# Altium PCB VCO_PCB.PcbDoc
Units mm, origin at the board's own origin, x right, y up, seen from the top; angles counter-clockwise.
Board outline 76.92 x 37.06 mm, 2 copper layers (Top Layer, Bottom Layer); 50 components, 27 nets, 118 pads, 28 vias.
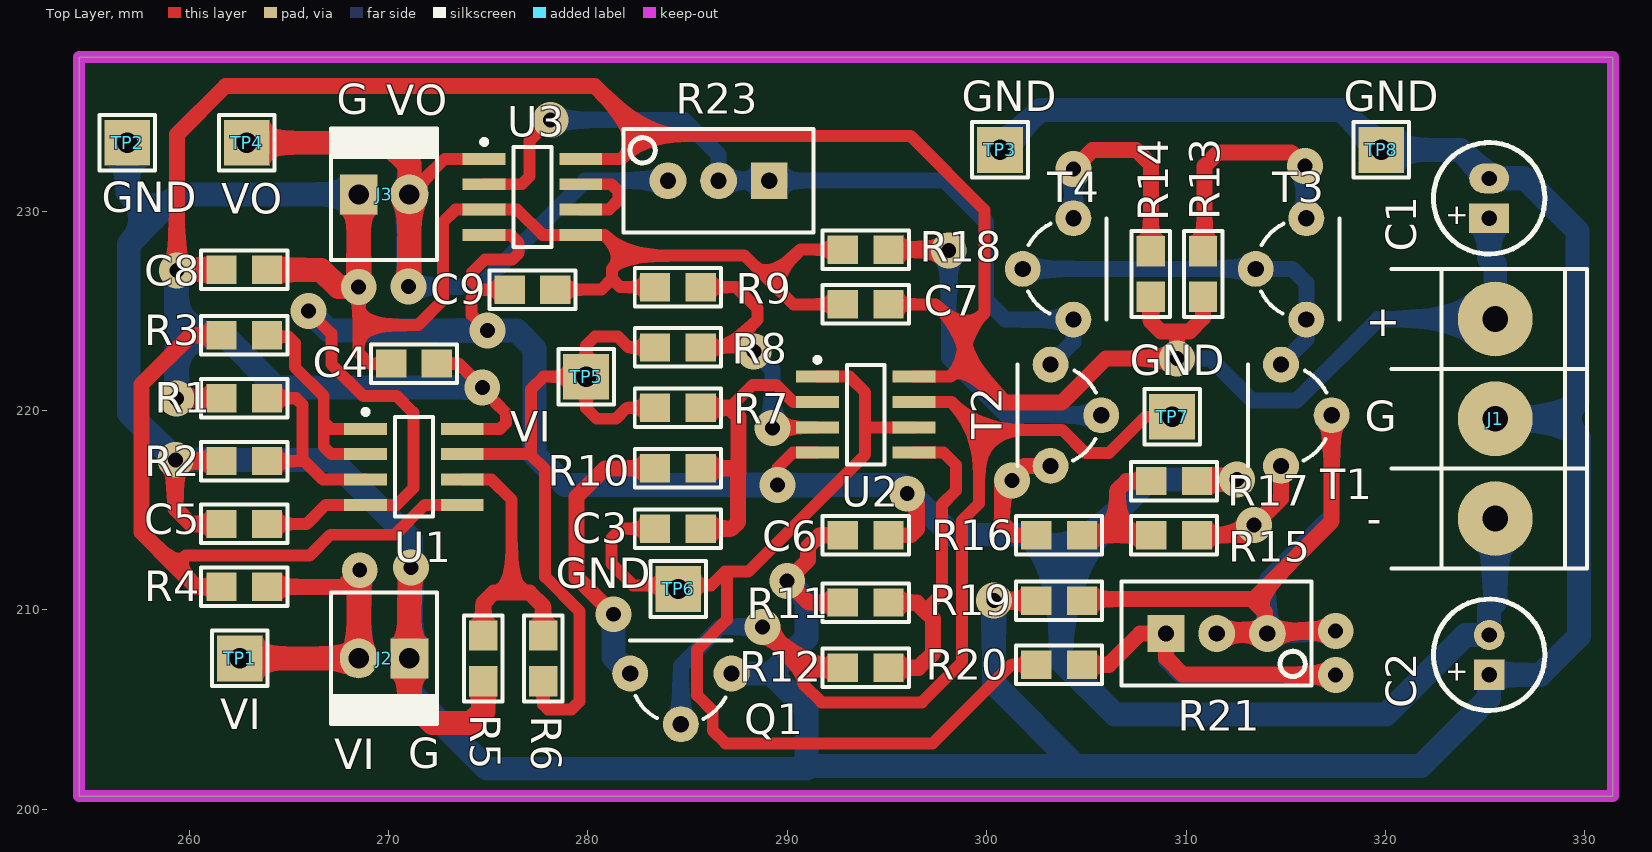
[diagram p0: Top Layer view]
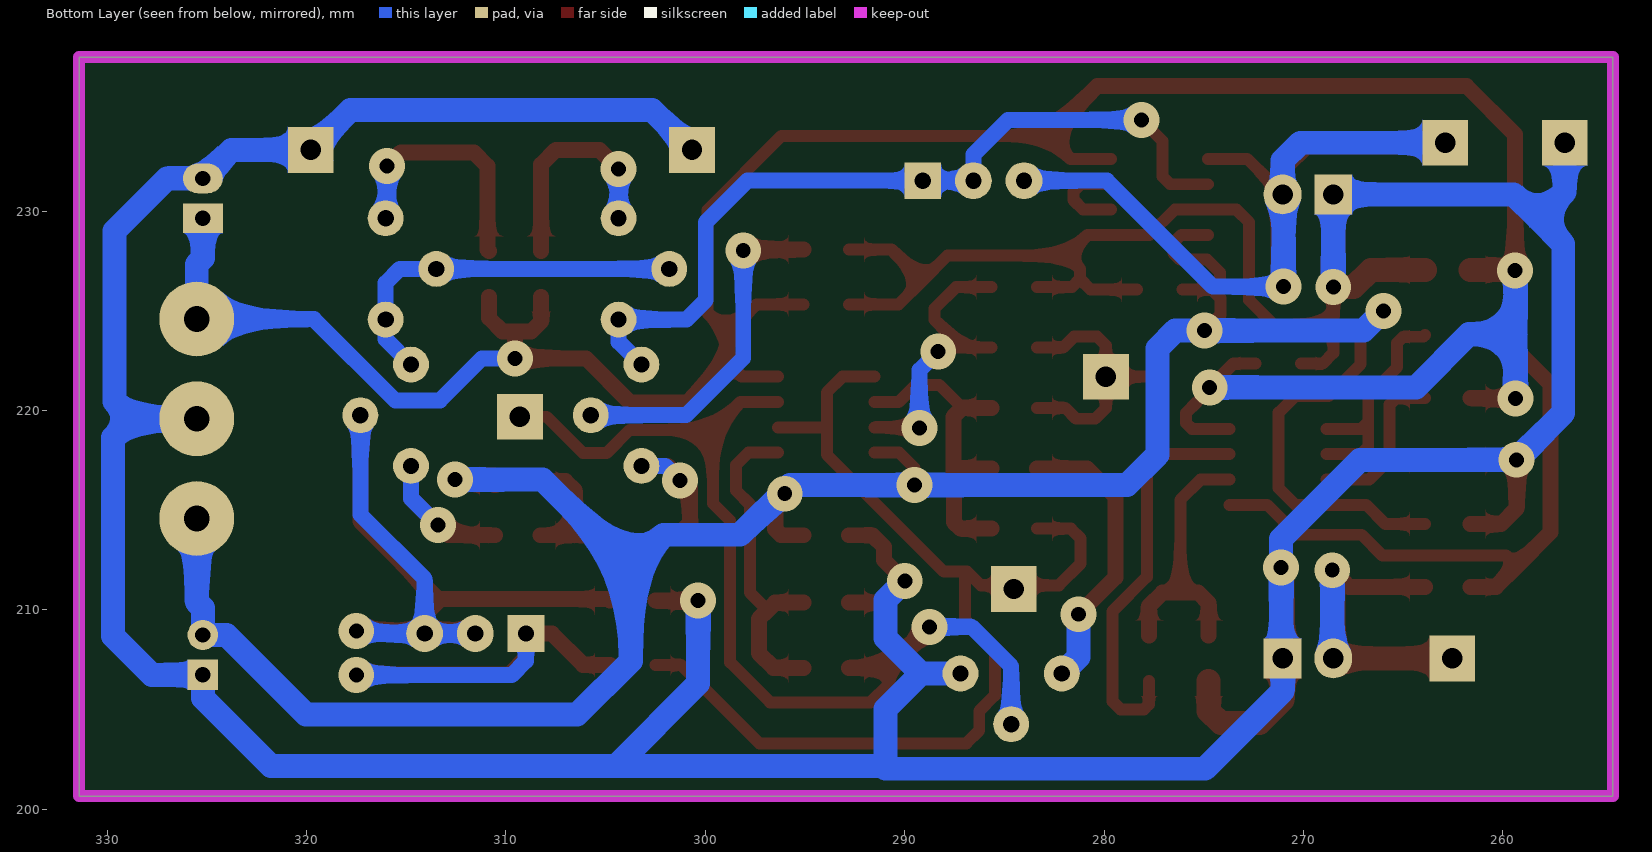
[diagram p1: Bottom Layer view, seen from below]
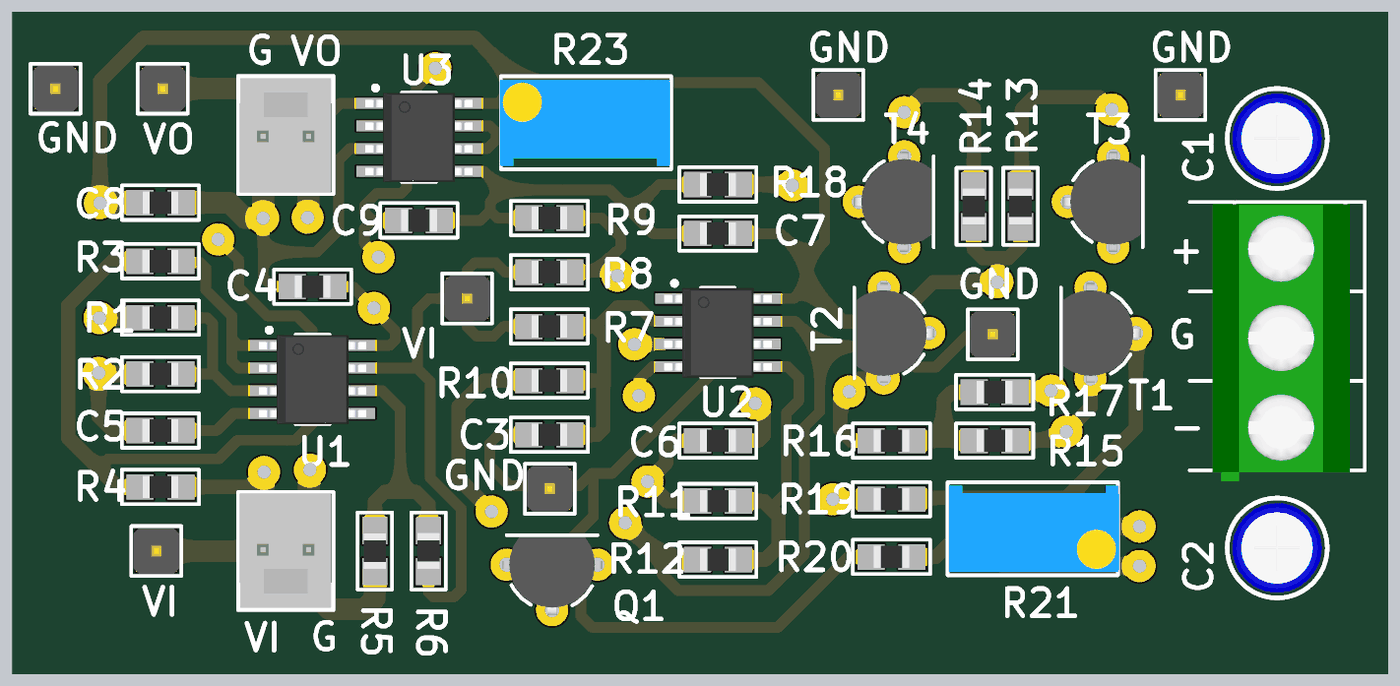
[diagram p2: 3D render of the assembled board from above, using the file's embedded part models]

## Layer stack, top to bottom
Top Solder: solder mask 0.0102, Solder Resist, Dk 3.5
Top Layer: signal copper 0.0356
Dielectric 1: dielectric 0.32, FR-4, Dk 4.8
Bottom Layer: signal copper 0.0356
Bottom Solder: solder mask 0.0102, Solder Resist, Dk 3.5

## Board outline
254.483,200.66 331.399,200.66 331.399,237.719 254.483,237.719

## Design rules (kind name [scope] priority, off if disabled: settings)
Clearance [All] p1: gap=0.4
PolygonConnect [All] p1: connectstyle=Relief reliefconductorwidth=0.254 reliefentries=4 polygonreliefangle="90 Angle" airgapwidth=0.254
RoutingVias [All] p1: holewidth=0.75 width=1.8 viastyle="Through Hole" minholewidth=0.75 minwidth=1.8 maxholewidth=0.75 maxwidth=1.8
SolderMaskExpansion [All] p1: expansion=0.102
Width [All] p1: maxlimit=1.2 minlimit=0.6 preferedwidth=0.8
30 further rules are at their usual default settings.

## Components (designator, comment, footprint, x,y, rotation, side; value= is the part's Value field where it differs from the comment)
C1 "10uF" CAP100RP#1 325.196,230.638 r90 top
C2 "10uF" CAP100RP#2 325.196,207.741 r90 top
C3 "8.2nF" 0805 284.505,214.071 r180 top
C4 "10nF" 0805 271.272,222.352 r0 top
C5 "10nF" 0805 262.763,214.306 r0 top
C6 "10nF" 0805 293.929,213.741 r0 top
C7 "10nF" 0805 293.929,225.323 r0 top
C8 "10nF" 0805 262.763,227.051 r180 top
C9 "10nF" 0805 277.216,226.06 r180 top
J1 "BORNERA 3" BORNERA3 325.501,219.583 r180 top
J2 "MOLEX2" MOLEX2 271.043,207.569 r180 top
J3 "MOLEX2" MOLEX2 268.503,230.835 r0 top
Q1 "2N7000" TO92#1 284.658,205.537 r0 top
R1 "330kR" 0805 262.763,220.618 r0 top
R2 "24kR" 0805 262.763,217.462 r0 top
R3 "18kR" 0805 262.763,223.774 r0 top
R4 "10kR" 0805 262.763,211.15 r180 top
R5 "10kR" 0805 274.752,207.569 r90 top
R6 "18kR" 0805 277.749,207.569 r270 top
R7 "3kR" 0805 284.505,220.129 r0 top
R8 "1kR" 0805 284.505,223.158 r0 top
R9 "1kR" 0805 284.505,226.187 r0 top
R10 "1k5R" 0805 284.505,217.1 r180 top
R11 "1kR" 0805 293.929,210.366 r180 top
R12 "1k5R" 0805 293.929,207.089 r180 top
R13 "3k3R" 0805 310.845,226.844 r90 top
R14 "3k3R" 0805 308.229,226.844 r90 top
R15 "47R" 0805 309.397,213.741 r180 top
R16 "47R" 0805 303.632,213.741 r180 top
R17 "15kR" 0805 309.397,216.459 r180 top
R18 "1kR" 0805 293.929,228.067 r0 top
R19 "1kR" 0805 303.632,210.464 r0 top
R20 "2k4R" 0805 303.632,207.239 r0 top
R21 "PRESET 50kR" "PRESET V" 311.531,208.813 r0 top
R23 "PRESET 50kR" "PRESET V" 286.553,231.521 r180 top
T1 "BC547" TO92#2 316.027,219.761 r90 top
T2 "BC547" TO92#2 304.47,219.761 r90 top
T3 "BC557" TO92#2 314.757,227.098 r270 top
T4 "BC557" TO92#2 303.073,227.098 r270 top
TP1 "VI" TPTH 262.534,207.569 r0 top
TP2 "GND" TPTH 256.896,233.426 r0 top
TP3 "GND" TPTH 300.66,233.07 r0 top
TP4 "VO" TPTH 262.89,233.426 r0 top
TP5 "VI" TPTH 279.908,221.691 r0 top
TP6 "GND" TPTH 284.531,211.049 r0 top
TP7 "GND" TPTH 309.296,219.685 r0 top
TP8 "GND" TPTH 319.786,233.07 r0 top
U1 "TL082D" SOIC8 271.272,217.17 r0 top
U2 "TL082D" SOIC8 293.929,219.786 r0 top
U3 "TL082D" SOIC8 277.216,230.708 r0 top

## Footprints (in the part's own frame and the unit in brackets; to place one, negate y for a bottom-side part, rotate by r counter-clockwise, add the part's x,y. Pads: shape width x height; smd on the part's side, far side on the other; paste and mask are expansions set on the pad)
0805 [mil] "Pasivo 0805"
  rect 60x56 smd: 1(-45,0) 2(45,0)
  silkscreen extent -85,-38 85,38, body extent -40,-25 39,25, height 15
BORNERA3 [mm] "Bornera con Tornillos 5mm separación"
  round 3.75 hole 1.3: 1(0,5) 2(0,0) 3(0,-5)
  silkscreen extent -4.6,-7.5 5.2,7.5, body extent -3.76,-7.39 3.94,8.11, height 10.05
CAP100RP#1 [mm] "Body diameter 5mm"
  rect 1.5x2 hole 0.762: 1(-1,0)
  oval 1.5x2 hole 0.762: 2(1,0)
  silkscreen extent -2.79,-2.79 2.79,2.79, body extent -2.53,-2.51 2.53,2.54, height 11.53
CAP100RP#2 [mm] "Body diameter 5mm"
  rect 1.524x1.524 hole 0.762: 1(-1,0)
  round 1.524 hole 0.762: 2(1,0)
  silkscreen extent -2.79,-2.79 2.79,2.79, body extent -2.53,-2.51 2.53,2.54, height 11.53
MOLEX2 [mm]
  rect 1.9x2 hole 1.016: 1(0,0)
  oval 1.9x2 hole 1.016: 2(2.54,0)
  silkscreen extent -1.4,-3.3 3.94,3.3, body extent -1.27,-3.17 3.81,3.18, height 10.74
"PRESET V" [mm]
  rect 1.85x1.85 hole 0.813: 1(-2.54,0)
  round 1.85 hole 0.813: 2(0,0) 3(2.54,0)
  silkscreen extent -4.76,-2.6 4.76,2.6, body extent -4.7,-2.42 4.83,2.42, height 11.55
SOIC8 [mm]
  rect 2.15x0.6 smd: 1(-2.425,1.905) 2(-2.425,0.635) 3(-2.425,-0.635) 4(-2.425,-1.905) 5(2.425,-1.905) 6(2.425,-0.635) 7(2.425,0.635) 8(2.425,1.905)
  silkscreen extent -2.55,-2.5 0.95,2.88, body extent -3.01,-2.51 3.01,2.49, height 1.75
TO92#1 [mm]
  round 1.8 hole 0.813: 1(0,-1.27) 2(-2.54,1.27) 3(2.54,1.27)
  silkscreen extent -2.54,-1 2.54,2.92, body extent -2.79,-1.55 2.79,2.79, height 8
TO92#2 [mm]
  round 1.8 hole 0.813: 1(0,-1.27) 2(2.54,1.27) 3(-2.54,1.27)
  silkscreen extent -2.54,-1 2.54,2.92, body extent -2.79,-1.55 2.79,2.79, height 8
TPTH [mm]
  rect 2.3x2.3 hole 1.016: 1(0,0)
  silkscreen extent -1.4,-1.4 1.4,1.4, body extent -1.27,-1.27 1.27,1.27, height 6.04

## Part data
C1 C2: library part CAPPOL
C3 C4 C5 C6 C7 C8 C9: library part CAP
Q1: library part "MOSFET N"
R1 R2 R3 R4 R5 R6 R7 R8 R9 R10 R11 R12 R13 R14 R15 R16 R17 R18 R19 R20: library part RES
R21 R23: library part PRESET
T1 T2: library part "TRANSISTOR NPN"
T3 T4: library part "TRANSISTOR PNP"
TP1 TP2 TP3 TP4 TP5 TP6 TP7 TP8: library part TP
U1 U2 U3: "JFET-Input Operational Amplifier"

## Via types
v1: diameter 1.8, hole 0.75, Top Layer to Bottom Layer, 28 vias

## Nets (pads, with @x,y where several pads share a name; then routed paths per layer and width w, separated by ;. In a path a pad name is that pad's centre, name@x,y a point inside that pad or via, vN(x,y) a via of type N, cw(c..) or ccw(c..) an arc to the next point about the centre after c; other vN are vias at no path point)
+VCC: C1.1 C4.2 C7.2 C8.2 J1.3 R1.1 R13.1 R14.1 U1.8 U2.8 U3.8 | length 146.6
  Top Layer w0.6: C4.2 273.507,222.352 v1(274.701,221.158) ; U1.8 275.59,219.075 275.895,219.38 275.895,219.862 275.336,220.421 ; U3.8 281.686,232.613 282.842,233.769 296.177,233.769 299.898,230.048 299.898,224.892 298.882,223.876 ; C7.2 297.434,225.323 298.882,223.876 ; U2.8 298.171,221.691 298.882,222.402 298.882,223.876
  Top Layer w0.8: v1(259.359,220.599) 259.378,220.618 R1.1 ; v1(259.385,227.025) 259.385,233.832 261.823,236.271 280.34,236.271 282.842,233.769 ; 298.882,222.402 300.888,220.396 303.759,220.396 305.968,222.606 v1(309.55,222.606) 309.55,223.876 309.575,223.901 309.524,223.952 ; R14.1 308.229,224.46 308.737,223.952 309.524,223.952 ; R13.1 310.845,224.638 310.159,223.952 309.524,223.952
  Top Layer w1.2: v1(259.385,227.025) 259.41,227.051 C8.2
  Bottom Layer w0.8: v1(309.55,222.606) 311.201,222.606 313.309,220.497 315.544,220.497 319.63,224.583 J1.3
  Bottom Layer w1.2: v1(259.359,220.599) 259.359,223.825 ; v1(259.385,227.025) 259.359,227.051 259.359,223.825 ; v1(274.701,221.158) 264.363,221.158 261.696,223.825 259.359,223.825 ; C1.1 325.196,227.635 325.501,227.33 J1.3
-VCC: C2.2 C5.2 C6.2 C9.2 J1.1 R17.1 U1.4 U2.4 U3.4 | length 130.9
  Top Layer w0.6: C5.2 265.894,214.306 266.852,215.265 U1.4 270.408,215.265 271.247,216.103 271.247,219.888 270.408,220.726 268.732,220.726 267.132,222.326 267.132,223.85 v1(265.989,224.993) ; U3.4 276.123,228.803 276.53,228.397 276.53,227.889 276.2,227.559 274.828,227.559 274.193,226.924 274.193,226.466 274.599,226.06 ; v1(274.955,224.003) 274.168,224.79 274.168,225.628 274.599,226.06 ; C9.2 274.599,226.06 ; v1(289.509,216.256) 289.509,217.119 289.916,217.526 289.918,217.526 290.273,217.881 U2.4
  Top Layer w0.8: C6.2 296.189,213.741 296.494,214.046 296.494,215.341 v1(296.012,215.824)
  Top Layer w1.2: R17.1 310.617,216.535 v1(312.547,216.535)
  Bottom Layer w0.8: v1(296.012,215.824) v1@296.012,215.951
  Bottom Layer w1.2: v1(265.989,224.993) 266.979,224.003 v1(274.955,224.003) 276.428,224.003 277.317,223.114 277.317,217.78 278.841,216.256 v1(289.509,216.256) 295.758,216.256 298.247,213.766 302.082,213.766 303.733,212.115 ; v1(312.547,216.535) 308.153,216.535 303.733,212.115 ; J1.1 325.501,210.388 325.196,210.083 C2.2 324.007,208.741 320.015,204.749 306.426,204.749 303.733,207.442 303.733,212.115
GND: C1.2 C2.1 C4.1 C5.1 C6.1 C7.1 C8.1 C9.1 J1.2 J2.1 J3.1 Q1.3 R2.1 R5.1 R9.1 R11.2 R18.1 R19.1 TP2.1 TP3.1 TP8.1 U3.3 U3.5 | length 284
  Top Layer w0.6: v1(268.503,226.187) 268.503,224.282 ; C4.1 269.037,222.352 268.503,222.885 268.503,224.282 ; C9.1 280.67,226.06 281.203,226.593 ; R9.1 281.61,226.187 281.203,226.593 ; C7.1 290.297,225.323 289.103,226.517 ; R18.1 290.652,228.067 289.103,226.517 ; 268.503,224.282 271.475,224.282 272.72,225.527 272.72,229.438 273.355,230.073 U3.3 276.454,230.073 277.724,228.803 U3.5 280.822,228.803 281.864,227.762 ; 281.203,226.593 281.203,227.101 281.864,227.762 ; 281.864,227.762 287.858,227.762 289.103,226.517
  Top Layer w0.8: C5.1 260.09,214.306 259.309,215.087 v1(259.309,217.526) 259.372,217.462 R2.1 ; R11.2 291.081,210.366 v1(289.992,211.455) 291.033,212.496 291.033,213.157 291.617,213.741 C6.1 ; v1(300.355,210.464) R19.1
  Top Layer w1.2: C8.1 266.618,227.051 267.482,226.187 v1(268.503,226.187) J3.1@268.503,230.632 ; v1(271.12,212.115) 271.043,212.039 J2.1 271.043,205.486 272.212,204.318 274.142,204.318 274.752,204.927 R5.1
  Bottom Layer w1.2: TP2.1 256.896,230.962 258.242,229.616 ; v1(268.503,226.187) J3.1 259.461,230.835 258.242,229.616 ; J2.1 271.043,205.918 274.93,202.032 290.957,202.032 290.957,205.029 289.179,206.807 ; J2.1@271.12,207.645 v1(271.12,212.115) 271.12,213.563 267.157,217.526 v1(259.309,217.526) 256.972,219.862 256.972,228.346 258.242,229.616 ; Q1.3 289.179,206.807 ; v1(289.992,211.455) 290.957,210.49 290.957,208.585 289.179,206.807 ; 291.008,202.159 321.767,202.159 325.196,205.588 C2.1 327.747,206.741 329.692,208.686 329.692,218.643 328.752,219.583 ; v1(300.355,210.464) 300.355,206.299 304.457,202.197 ; TP3.1 302.666,235.077 317.779,235.077 TP8.1 323.764,233.07 C1.2 326.984,231.638 329.616,229.006 329.616,220.447 328.752,219.583 ; J1.2 328.752,219.583
NetC3_1: C3.1 R7.2 R10.1 U2.2 | length 16.5
  Top Layer w0.6: 287.109,220.129 288.265,221.285 289.433,221.285 290.297,220.421 U2.2
  Top Layer w0.8: C3.1 287.198,214.071 287.528,214.401 287.528,216.827 287.555,216.854 287.555,217.1 ; R10.1 287.555,217.1 ; R7.2 287.109,220.129 287.555,219.683 287.555,217.1
NetQ1_2: Q1.2 R10.2 | length 14.5
  Top Layer w0.8: v1(281.28,209.779) 279.425,211.633 279.425,215.671 280.854,217.1 R10.2
  Bottom Layer w1.2: v1(281.28,209.779) 281.28,207.645 Q1.2
NetR1_2: R1.2 R2.2 U1.3 | length 10.1
  Top Layer w0.6: R2.2 265.595,217.462 265.684,217.551 ; R1.2 265.36,220.618 265.684,220.294 265.684,217.551 ; U1.3 266.7,216.535 265.684,217.551
NetR3_1: R3.1 R4.2 U1.5 | length 33.3
  Top Layer w0.6: 259.309,212.192 259.842,212.725 266.04,212.725 267.081,213.766 270.324,213.766 271.823,215.265 U1.5
  Top Layer w0.8: R4.2 260.35,211.15 259.309,212.192 257.609,213.892 257.609,221.312 260.071,223.774 R3.1
NetR3_2: R3.2 U1.1 U1.2 | length 11.9
  Top Layer w0.6: R3.2 263.985,223.695 265.001,223.695 265.303,223.393 265.303,222.174 266.751,220.726 266.751,219.431 ; U1.2 267.132,217.805 266.751,218.186 266.751,219.431 ; U1.1 267.106,219.075 266.751,219.431
NetR5_2: R5.2 R6.1 U1.6 | length 14.1
  Top Layer w0.6: U1.6 275.158,216.535 276.174,215.519 276.174,210.871
  Top Layer w0.8: R5.2 274.752,210.337 275.285,210.871 276.174,210.871 277.063,210.871 277.749,210.185 R6.1
NetR8_2: R8.2 R9.2 U2.3 | length 15.1
  Top Layer w0.6: R8.2 287.103,223.158 ; R9.2 287.426,226.187 288.493,225.12 288.493,224.549 287.103,223.158 ; v1@288.119,223.158 287.103,223.158 ; v1(289.255,219.126) 289.281,219.151 U2.3
  Top Layer w0.8: v1@288.119,223.158 v1(288.315,222.961)
  Bottom Layer w0.8: v1(288.315,222.961) 289.255,222.021 v1(289.255,219.126)
NetR11_1: R11.1 R12.1 U2.5 | length 17.1
  Top Layer w0.6: U2.5 297.84,217.881 298.45,217.272 298.45,215.976 297.755,215.281 297.755,210.862 296.875,209.982
  Top Layer w0.8: R12.1 296.573,207.089 297.307,207.823 297.307,209.55 296.875,209.982 296.491,210.366 R11.1
NetR13_2: R13.2 T3.3 | length 12.6
  Top Layer w0.8: R13.2 310.921,228.063 310.921,232.258 311.607,232.943 315.265,232.943 v1(315.951,232.258)
  Bottom Layer w0.8: v1(315.951,232.258) 315.951,229.714 T3.3
NetR14_2: R14.2 T4.3 | length 11.4
  Top Layer w0.8: v1(304.343,232.105) 305.308,233.07 307.492,233.07 308.229,232.334 R14.2
  Bottom Layer w0.8: T4.3 v1(304.343,232.105)
NetR15_1: R15.1 T1.3 | length 10.1
  Top Layer w0.8: R15.1 312.903,213.741 v1(313.411,214.249) 314.757,215.595 T1.3
  Bottom Layer w0.8: v1(313.411,214.249) 314.757,215.595 T1.3
NetR15_2: R15.2 R16.1 R17.2 | length 7.6
  Top Layer w0.8: R16.1 306.553,213.741 ; R15.2 306.553,213.741 ; R17.2 307.01,216.459 306.553,216.002 306.553,213.741
NetR16_2: R16.2 T2.3 | length 9.3
  Top Layer w0.8: v1@301.269,216.078 v1(301.269,216.484) ; R16.2 301.396,213.741 300.761,214.376 300.761,216.103 301.879,217.221 T2.3
  Bottom Layer w0.8: v1(301.269,216.484) 302.006,217.221 T2.3
NetR18_2: R18.2 T2.1 | length 17.3
  Top Layer w0.8: R18.2 298.044,228.067 v1(298.094,228.016)
  Bottom Layer w0.8: v1(298.094,228.016) 298.094,222.631 300.965,219.761 T2.1
NetR19_2: R19.2 R21.2 R21.3 T1.1 | length 48.6
  Top Layer w0.8: R19.2 304.775,210.538 313.286,210.538 313.334,210.49 ; T1.1 317.297,214.452 313.334,210.49 ; v1(317.5,208.94) 314.198,208.94 R21.3@313.944,208.94 ; 313.334,210.49 313.944,209.88 R21.3@313.944,208.94 ; R21.3@313.944,208.94 311.658,208.94 R21.2 R21.3 R21.3@313.944,208.94
  Top Layer w1.2: R21.3 R21.3@314.198,208.94
  Bottom Layer w0.8: R21.2 R21.3 ; T1.1 317.297,214.782 314.071,211.557 R21.3 ; v1(317.5,208.94) 317.373,208.813 R21.3
NetR20_2: R20.2 R21.1 | length 24.7
  Top Layer w0.8: R20.2 306.121,207.239 307.696,208.813 R21.1 ; R21.1@308.991,208.382 308.991,207.594 309.829,206.756 317.525,206.756 v1(317.5,206.731)
  Bottom Layer w0.8: R21.1 308.991,207.442 309.702,206.731 v1(317.5,206.731)
NetR23_1: R23.1 R23.2 T2.2 T4.2 U3.2 | length 41.9
  Top Layer w0.6: U3.2 276.682,231.343 277.063,231.724 277.063,233.502 v1(278.13,234.569)
  Bottom Layer w0.8: v1(278.13,234.569) 284.81,234.569 286.553,232.826 R23.2 R23.1 297.891,231.521 299.974,229.438 299.974,225.527 300.942,224.558 T4.2 304.343,223.444 T2.2
NetT1_2: T1.2 T3.1 T3.2 T4.1 | length 19.1
  Bottom Layer w0.8: T4.1 T3.1 315.319,227.098 316.027,226.39 T3.2 316.027,223.571 T1.2
NetU3_6: U3.6 U3.7 | length 4.6
  Top Layer w0.6: U3.6 281.051,230.073 281.534,230.556 281.534,230.988 281.178,231.343 U3.7
VACOND: R6.2 R7.1 R8.1 TP5.1 U1.7 | length 38.2
  Top Layer w0.6: U1.7 277.089,217.805 ; R6.2 277.749,205.257 278.003,205.003 279.171,205.003 279.578,205.41 279.578,209.925 277.851,211.652 277.851,217.043 277.089,217.805 ; TP5.1@279.197,221.666 TP5.1@279.908,221.666 ; TP5.1@280.06,221.666 TP5.1@279.908,221.666 ; R7.1 281.953,220.129 281.407,219.583 280.441,219.583 279.908,220.116 TP5.1@279.908,221.666 ; R8.1 282.048,223.158 281.508,223.698 280.34,223.698 279.908,223.266 TP5.1 ; 277.089,217.805 277.136,217.852 277.136,221.053 277.774,221.691 TP5.1 ; TP5.1@279.908,221.666 TP5.1
VCUAD: Q1.1 R12.2 TP7.1 U2.7 | length 49.5
  Top Layer w0.6: 290.802,207.089 290.802,206.276 291.719,205.359 296.748,205.359 298.755,207.366 298.755,214.478 299.618,215.341 299.618,219.024 ; U2.7 298.221,220.421 299.618,219.024 ; TP7.1 307.95,219.685 306.121,217.856 304.952,217.856 303.784,219.024 299.618,219.024
  Top Layer w0.8: v1(288.747,209.144) 290.802,207.089 R12.2
  Bottom Layer w0.8: Q1.1 284.658,207.162 286.639,209.144 v1(288.747,209.144)
VI: J2.2 R4.1 TP1.1 | length 19.8
  Top Layer w0.8: R4.1 267.716,211.15 268.503,211.938 v1(268.554,211.988)
  Top Layer w1.2: TP1.1 J2.2 v1@268.503,211.938
  Bottom Layer w1.2: J2.2 268.554,207.62 v1(268.554,211.988)
VSENO: J3.2 R23.3 TP4.1 U3.1 | length 48.8
  Top Layer w0.6: J3.2 272.821,232.613 U3.1
  Top Layer w1.2: TP4.1 269.951,233.426 271.043,232.334 J3.2 271.043,226.263 v1(270.993,226.212)
  Bottom Layer w0.8: v1(270.993,226.212) 274.549,226.212 279.857,231.521 R23.3
  Bottom Layer w1.2: TP4.1 270.154,233.426 271.043,232.537 J3.2 ; v1(270.993,226.212) J3.2@270.993,230.378
VTRIANG: C3.2 R20.1 TP6.1 U2.1 U2.6 | length 54.9
  Top Layer w0.6: C3.2 281.661,214.071 281.178,213.589 281.178,212.319 282.27,211.226 286.182,211.226 286.868,211.912 286.969,211.912 ; U2.1 293.116,221.691 293.903,220.904 293.903,219.1 ; U2.6 293.954,219.151 293.903,219.1 ; R20.1 301.219,207.239 297.282,203.302 286.906,203.302 286.258,203.95 286.258,204.93 285.471,205.716 285.471,208.001 286.969,209.499 286.969,211.912 ; 286.969,211.912 288.036,211.912 293.903,217.78 293.903,219.1

## Keep-outs
Keep-Out Layer:
  the board outline again, w0.6

## Silkscreen, mask and mechanical layers (free items; w line width, h text height)
Top Overlay:
  text "G" at 267.411,234.848 h1.52
  text "VO" at 269.875,234.798 h1.52
  text "+" at 318.999,223.723 h1.52
  text "G" at 318.948,218.948 h1.52
  text "-" at 319.049,213.843 h1.52
  text "G" at 270.993,202.057 h1.52
  text "VI" at 267.284,202.006 h1.52

## Text inside footprints (layer, text, board x,y; h text height)
C1: Top Overlay "+" at 324.028,229.19 h1.02 r90
C2: Top Overlay "+" at 324.028,206.294 h1.02 r90